# Altium PCB Main.PcbDoc (part 2 of 4)
Units mm, origin at the board's own origin, x right, y up, seen from the top; angles counter-clockwise.
Board outline 180 x 80 mm, 4 copper layers (L1_TOP, L2_GND, L3_PWR, L4_BOT), stack 1.447 mm thick; 236 components, 173 nets, 792 pads, 473 vias.
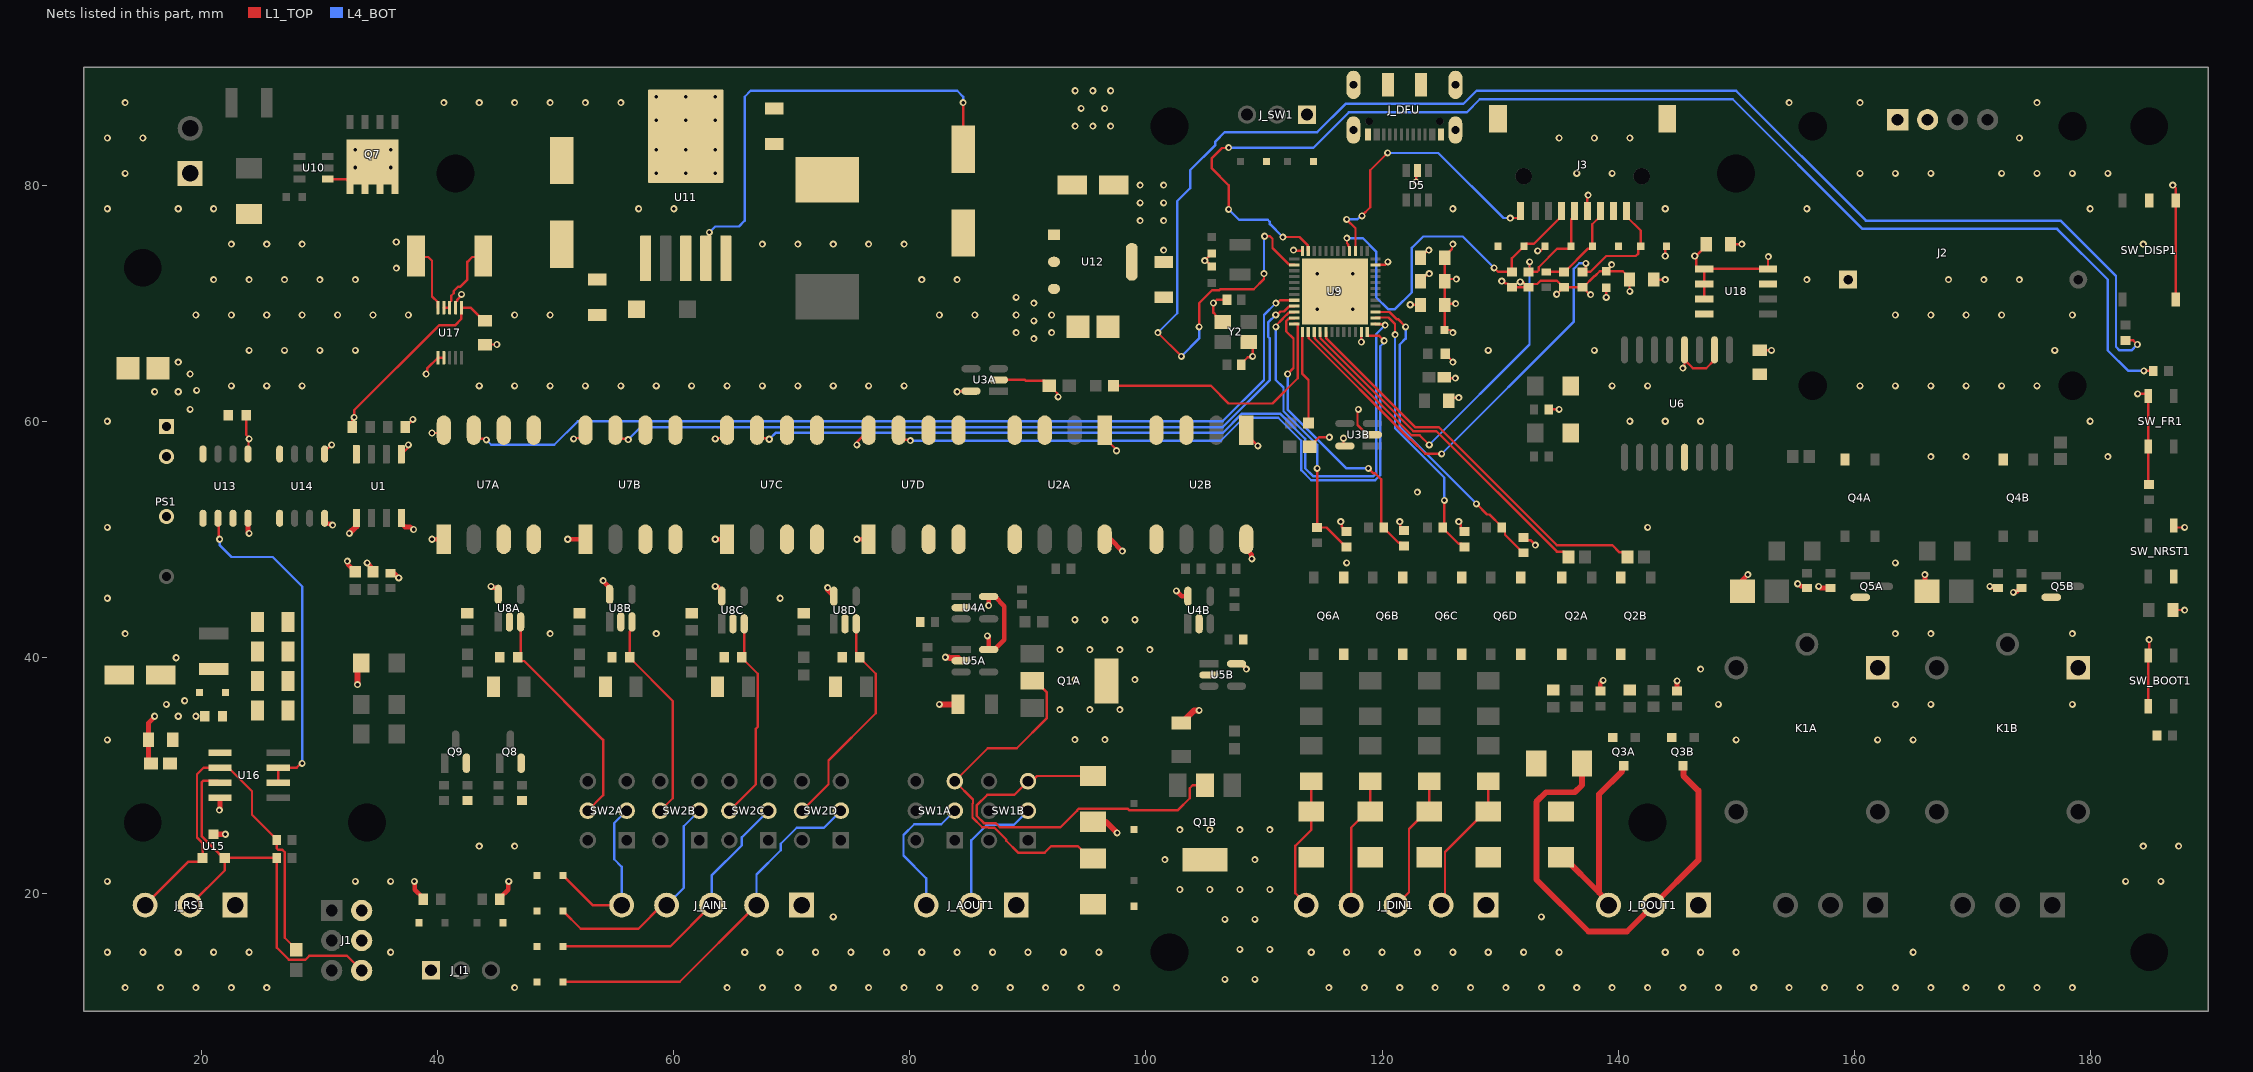
[diagram p4: the nets of this part, all layers, seen from the top]

## Part data (continued)
C19: library part CMP-2000-06208-3, "CAP ALUM 100UF 20% 50V SMD", Case/Package=Radial, Dielectric Material=Aluminium, ESR (Equivalent Series Resistance)=340mR, Leakage Current=3uA, Max Operating Temperature=105°C, Min Operating Temperature=-55°C, Package Quantity=1, Ripple Current=350mA, Tolerance=20%, Voltage=50V, Capacitance=100uF, Construction=Cylindrical, Contact Plating=Tin, Diameter=8mm, Height=10.2mm, Height - Seated (Max)=0.402inch, Impedance=340mR, Lead Free="Lead Free", Length=10.2mm, Life (Hours)=2000Hour, Material=Aluminium, Mount="Surface Mount", Number of Pins=2, Packaging="Tape and Reel", Radiation Hardening=No, REACH SVHC="No SVHC", Ripple Current (AC)=350mA, RoHS Compliant=Yes, Series=FK, Termination=SMD/SMT, Voltage Rating=50V, Voltage Rating (DC)=50V, Width=10mm
C20: library part CMP-2000-06215-2, "CAP ALUM 220UF 20% 35V SMD", Case/Package=Radial, ESR (Equivalent Series Resistance)=80mR, Leakage Current=77uA, Max Operating Temperature=105°C, Min Operating Temperature=-55°C, Package Quantity=500, Ripple Current=850mA, Tolerance=20%, Voltage=35V, Capacitance=220uF, Construction=Cylindrical, Contact Plating=Tin, Diameter=8mm, Height=10.2mm, Height - Seated (Max)=0.402inch, Lead Free="Lead Free", Lead Pitch=3.1mm, Length=10.5mm, Life (Hours)=2000Hour, Material=Aluminium, Mount="Surface Mount", Number of Pins=2, Packaging="Tape and Reel", Polarity=Polar, Radiation Hardening=No, REACH SVHC="No SVHC", Ripple Current (AC)=850mA, RoHS Compliant=Yes, Series=FP, Termination=SMD/SMT, Voltage Rating=35V, Voltage Rating (DC)=35V, Width=8.3mm
C21 C22 C24: library part CMP-2000-05018-2, "General Purpose Ceramic Capacitor, 1206, 100nF, 10%, X7R, 15%, 50V", Case Code (Imperial)=1206, Case Code (Metric)=3216, Dielectric=X7R, Dielectric Material=Ceramic, Insulation Resistance=100GR, Max Operating Temperature=125°C, Min Operating Temperature=-55°C, Package Quantity=1, Tolerance=10%, Voltage=50V, Capacitance=100nF, Case/Package=1206, Construction=Flat, Contact Plating=Tin, Depth=1.6mm, Dissipation Factor=2.5%, Height=0.94mm, Lead Free="Lead Free", Length=3.2mm, Mount="Surface Mount", Number of Pins=2, Packaging="Tape and Reel", Radiation Hardening=No, REACH SVHC="No SVHC", RoHS Compliant=Yes, Series=-, Termination=SMD/SMT, Thickness=0.037inch, Voltage Rating=50V, Voltage Rating (DC)=50V, Width=1.6mm
C27: library part CMP-2006-02792-2, "Chip Multilayer Ceramic Capacitors for General Purpose, 0603, 10uF, X5R, 15%, 20%, 6.3V", Case Code (Imperial)=0603, Case Code (Metric)=1608, Dielectric=X5R, Max Operating Temperature=85°C, Min Operating Temperature=-55°C, Package Quantity=4000, Tolerance=20%, Voltage=6.3V, Capacitance=10uF, Case/Package=0603, Depth=0.8mm, Height=0.8mm, Lead Free="Lead Free", Length=1.6mm, Material=Ceramic, Mount="Surface Mount", Packaging="Tape and Reel", Radiation Hardening=No, REACH SVHC="No SVHC", Termination=SMD/SMT, Thickness=0.035inch, Voltage Rating=6.3V, Voltage Rating (DC)=6.3V, Width=0.031inch
C30: library part CMP-2000-04979-3, "Multilayer Ceramic Capacitors 10μF ±10% 10V X5R SMD 0603", Case Code (Imperial)=0603, Case Code (Metric)=1608, Dielectric=X5R, Dielectric Material=Ceramic, Max Operating Temperature=85°C, Min Operating Temperature=-55°C, Package Quantity=1, Tolerance=10%, Voltage=10V, Capacitance=10uF, Case/Package=0603, Construction=Flat, Depth=0.8mm, Height=0.8mm, Lead Free="Lead Free", Length=1.6mm, Mount="Surface Mount", Number of Pins=2, Packaging="Tape and Reel", Radiation Hardening=No, REACH SVHC="No SVHC", Resistor Type=Ceramic, RoHS Compliant=Yes, Series=C, Termination=SMD/SMT, Thickness=0.035inch, Voltage Rating=10V, Voltage Rating (DC)=10V, Weight=7.1E-05oz, Width=0.8mm
D1A D1B D4A D4B D4C D4D D6 D7 D11 D13 D14 D15 D16 D23 D24: library part CMP-14432-000001-1, "TVS DIODE 5V 14V SOD323"
D2A D2B D3A D3B D10 D18A D18B D18C D18D: library part CMP-02577-000018-1, "TVS DIODE 30V 48.4V DO214AA", Breakdown Voltage=33.3V, Clamping Voltage=48.4V, Manufacturer="Vishay Semiconductor Diodes Division", Manufacturer Part Number=SMBJ30CAHE3/52, Max Junction Temp=+150°C, Package=DO-214AA, Peak Pulse Current=12.4A, Peak Pulse Power=600W, Reverse Standoff Voltage=30V, Temperature="-55°C to +150°C", Temperature Range Low=-55°C, Automotive=Yes, Automotive Grade="Grade 0", Category=Diode, ComponentLink2Description=Datasheet, ComponentLink2URL=http://www.vishay.com/docs/88392/smbj.pdf, Device Class L1="Circuit Protection", Device Class L2="TVS Diodes", Device Class L3=unset, Digikey Description="TVS DIODE 30V 48.4V DO214AA", Direction=Bidirectional, Footprint Url=http://www.vishay.com/docs/95401/smb.pdf, Height=2.44mm, Lead Free=Yes, Mouser Description="Diode TVS Single Bi-Dir 30V 600W 2-Pin DO-214AA T/R", Number Of Channels=1, Octopart=https://octopart.com/smbj30cahe3%2F52-vishay-43725255, RoHS=TRUE, Standoff Height=0mm, Temperature Range High=+150°C
D5: library part CMP-2000-05358-1, "RailClamp(R) Low Capacitance TVS Diode Array, 5 pF, 17.5 VC, -55 to 125 degC, 6-Pin SOT23, RoHS, Tape and Reel", Capacitance Value=5pF, Clamping Voltage=17.5V, Clamping Voltage (Max)=12.5V, Leakage Current=5uA, Manufacturer=Semtech, Operating Temp Range=-55Cto125C, Operating Temperature Classification=Military, Operating Temperature Max Deg. C=125C, Operating Temperature Min Deg. C=-55C, Package / Case=SOT-23, Package Description="6-Pin Small Outline Transistor, Body 2.9 x 1.6 mm, Pitch 0.95 mm", Package Reference=SOT23-6, Peak Pulse Current=12A, Peak Pulse Power Dissipation=300W, Reverse Breakdown Voltage=6V, Reverse Stand-off Voltage=5V, Test Current (It)=1mA, Configuration=Quad, Datasheet URL=https://datasheet.ciiva.com/8029/srv05-4-8029973.pdf, Datasheet Version=Jan-08, Direction Type=Uni-Directional, Leakage Current (Max)=5uA, Manufacturer URL=http://www.semtech.com/, Mounting=SurfaceMount, Mounting Style=SurfaceMount, Number of Elements=1, Packaging=TapeandReel, Pin Count=6, Polarity=Uni-Directional, Product Depth (mm)=1.6mm, Product Height (mm)=1.15mm, Product Length (mm)=2.9mm, Rad Hardened=No, Suppressor Type=DiodeArrays, Working Voltage=5V, Working Voltage (Max)=5V
D8 D9 D19 D22A D22B: library part CMP-1426-00017-3, "Led, Red, 630 Nm, 1.9 V, 30 Ma, 60 Mcd Rohs Compliant: Yes", Case Code (Imperial)=1206, Case Code (Metric)=3216, Color=Red, Forward Current=100mA, Forward Voltage=1.9V, Max Operating Temperature=85°C, Max Reverse Voltage (DC)=5V, Min Operating Temperature=-40°C, Test Current=20mA, Case/Package=1206, Dominant Wavelength=630nm, Height=680µm, Length=3.2mm, Lens Style="Clear, Rectangular", Luminous Intensity=60mcd, Mount="Surface Mount", Packaging="Tape and Reel", Peak Wavelength=645nm, REACH SVHC=Unknown, RoHS=Compliant, Viewing Angle=140°, Wavelength=630nm, Width=1.6mm
D12: "3A, 60V, Schottky Rectifier", Package="DO-221AC Taiwan Semiconductor", Availability="Not in stock", Check_prices=https://www.snapeda.com/parts/SS36ALH/Taiwan+Semiconductor/view-part/?ref=eda, MF="Taiwan Semiconductor", MP=SS36ALH, Price=None, SnapEDA_Link=https://www.snapeda.com/parts/SS36ALH/Taiwan+Semiconductor/view-part/?ref=snap
D17A D17B: library part CMP-12389-000001-1, "Rectifier, 1Kv, 1A, Do-214Ac Rohs Compliant: Yes"
D20 D21: library part CMP-1426-00015-3, "WL-SMCW SMT Mono-Color Chip LED Waterclear", Case Code (Imperial)=1206, Case Code (Metric)=3216, Color=Blue, Forward Current=100mA, Forward Voltage=3.2V, Manufacturer Package Identifier=LED_1206, Max Operating Temperature=85°C, Max Reverse Voltage (DC)=5V, Min Operating Temperature=-40°C, Test Current=20mA, Case/Package=1206, Dominant Wavelength=470nm, Height=680µm, Length=3.2mm, Lens Style="Clear, Rectangular", Luminous Intensity=145mcd, Mount="Surface Mount", Packaging="Tape and Reel", Peak Wavelength=465nm, REACH SVHC=Unknown, RoHS=Compliant, Viewing Angle=140°, Wavelength=470nm, Width=1.6mm
F1 F2: library part CMP-07400-000009-1, "PTC RESET FUSE 30V 200MA 1210", Current Rating=10A, Hold Current=0.2A, Manufacturer="Bourns Inc.", Manufacturer Part Number=MF-USMF020-2, Package=MF-USMF, Resistance=0.4-5Ω, Temperature="-40°C to +85°C", Temperature Range High=+85°C, Temperature Range Low=-40°C, Trip Current=0.4A, Voltage Rating=30V, Automotive=Yes, Automotive Grade="Grade 3", Category=Fuse, ComponentLink2Description=Datasheet, ComponentLink2URL=https://www.bourns.com/docs/Product-Datasheets/mfusmf.pdf, Device Class L1="Circuit Protection", Device Class L2="PTC Resettable Fuses", Device Class L3=unset, Digikey Description="PTC RESET FUSE 30V 200MA 1210", Height=1.1mm, Lead Free=Yes, Mouser Description="Resettable Fuses - PPTC 0.20A 30V 0.40ohm Hold .20A Trip .4A", Octopart=https://octopart.com/mf-usmf020-2-bourns-46429, RoHS=TRUE, Trip Time=0.02s
FB1: library part CMP-0686-00457-3, "Chip Ferrite Bead, 0603, 1000Ω @ 100MHz, 0.5Ω, 25%, 450mA", Case Code (Imperial)=0603, Case Code (Metric)=1608, Current Rating=400mA, DC Resistance (DCR)=500mR, DC Resistance-Max=700mR, Frequency=100MHz, Max Operating Temperature=125°C, Min Operating Temperature=-55°C, Package Quantity=1, Tolerance=25%, Case/Package=0603, Core Material=Ferrite, DC Current=400mA, Depth=0.8mm, Height=0.8mm, Impedance=1kR, Lead Free="Lead Free", Length=1.6mm, Material=Steel, Max Current Rating=400mA, Max DC Current=400mA, Military Standard=Not, Number of Circuits=1, Number of Lines=1, Number of Pins=2, Packaging="Tape and Reel", Radiation Hardening=No, REACH SVHC="No SVHC", Resistance=500mR, Series=BLM18A, Shielding=Unshielded, Termination=SMD/SMT, Test Frequency=100MHz, Width=0.8mm
J3: "Micro SD Card Connector, 8 Positions, Connector and Ejector, Push In, Auto Eject Out, Surface Mount, 1.85 mm Heaight Above Board, Gold Flash", Package=None, Check_prices=https://www.snapeda.com/parts/MSD-11-A/Same+Sky/view-part/?ref=eda, MF="Same Sky", MP=MSD-11-A, SnapEDA_Link=https://www.snapeda.com/parts/MSD-11-A/Same+Sky/view-part/?ref=snap
J-SUPPLY1: Manufacturer_Name=Degson, Manufacturer_Part_Number=15EDGRC-3.81-02P-14-00A(H), Datasheet Link=https://www.tme.com/uz/ru/details/15edgrc3.81-02p/klemmnye-kolodki-razemnogo-tipa/degson-electronics/15edgrc-3-81-02p-14-00a-h/, Geometry.Height=7.2mm
J_AIN1 J_DIN1: library part 15EDGRC-3.81-05P, Manufacturer_Name=Degson, Manufacturer_Part_Number=15EDGRC-3.81-02P-14-00A(H), Datasheet Link=https://www.tme.com/uz/ru/details/15edgrc3.81-02p/klemmnye-kolodki-razemnogo-tipa/degson-electronics/15edgrc-3-81-02p-14-00a-h/, Geometry.Height=7.2mm
J_AOUT1 J_DOUT1 J_RELAY1 J_RELAY2 J_RS1: library part 15EDGRC-3.81-03P, Manufacturer_Name=Degson, Manufacturer_Part_Number=15EDGRC-3.81-02P-14-00A(H), Datasheet Link=https://www.tme.com/uz/ru/details/15edgrc3.81-02p/klemmnye-kolodki-razemnogo-tipa/degson-electronics/15edgrc-3-81-02p-14-00a-h/, Geometry.Height=7.2mm
J_DFU: library part DX07S016JA1R1500, "USB-C (USB TYPE-C) USB 2.0 Receptacle Connector 24 (16+8 Dummy) Position Surface Mount, Right Angle; Through Hole", Package=None, Availability=Unavailable, MP=DX07S016JA1R1500, Price=None
J_I1 J_SW1: library part CMP-04776-000237-1, "CONN HEADER VERT 3POS 2.54MM", Color=Black, Contact Resistance=20mR, Current Rating=3A, Max Operating Temperature=125°C, Max Voltage Rating (DC)=350.35kV, Min Operating Temperature=-55°C, Voltage Rating=350V, Contact Gender=Male, Contact Material=Brass, Contact Mating Length=6.75mm, Contact Plating=Tin, Contact Post Length=2.9mm, Gender=Male, Glow Wire Compliant=Non-compliant, Housing Color=Black, Housing Material=Polyester, Lead Free="Lead Free", Mount="Through Hole", Number of Circuits=3, Number of Contacts=3, Number of Positions=3, Number of Rows=1, Orientation=Vertical, Packaging=Tray, Pitch=2.54mm, Radiation Hardening=No, REACH SVHC="No SVHC", RoHS Compliant=Yes, Series=90120, Termination=Solder, Voltage Rating (AC)=350V
K1A K1B: "5V Trigger Relay Module For Arduino And Raspberry Pi 5V Trigger Relay Module For Arduino And Raspberry Pi", Package="NON STANDARD-5 Songle Relay", Availability="Not in stock", Check_prices=https://www.snapeda.com/parts/SRD-05VDC-SL-C/Songle+Relay/view-part/?ref=eda, MF="Songle Relay", MP=SRD-05VDC-SL-C, Price=None, SnapEDA_Link=https://www.snapeda.com/parts/SRD-05VDC-SL-C/Songle+Relay/view-part/?ref=snap
L1: library part SPD127R-473M, "Fixed Inductors 47uH 20% .1ohm Shielded Choke SMT", Manufacturer_Name="API Delevan", Mouser Part Number=807-SPD127R-473M, Datasheet Link=https://componentsearchengine.com/Datasheets/1/SPD127R-473M.pdf, Geometry.Height=8mm, Manufacturer_Part_Number=SPD127R-473M, Mouser Price/Stock=https://www.mouser.co.uk/ProductDetail/API-Delevan/SPD127R-473M?qs=Ri2cEtl8%2FQnrzzldCovvkw%3D%3D
PS1: library part 2S7BE_0505S3U, "Isolated Module DC DC Converter 1 Output 5V 400mA 4.5V - 5.5V Input", Package=None, Check_prices=https://www.snapeda.com/parts/2S7BE_0505S3U/Gaptec/view-part/?ref=eda, MF=Gaptec, MP=2S7BE_0505S3U, SnapEDA_Link=https://www.snapeda.com/parts/2S7BE_0505S3U/Gaptec/view-part/?ref=snap
Q1A Q1B: library part CMP-1048-00522-1, "NPN Silicon Epitaxial Transistor, 4-Pin SOT-223, Pb-Free, Tape and Reel", Manufacturer="On Semiconductor", PartNumber=SBCP56T1G, ComponentLink1Description="Manufacturer URL", ComponentLink1URL=http://www.onsemi.com/, ComponentLink2Description=Datasheet, ComponentLink2URL=http://www.onsemi.com/pub_link/Collateral/BCP56T1-D.PDF, ComponentLink3Description="Package Specification", ComponentLink3URL=http://www.onsemi.com/pub_link/Collateral/318E-04.PDF, DatasheetVersion="Rev. 8", IC Continuous (A)=1, Mounting Technology="Surface Mount", PackageDescription="4-Pin Small Outline Transistor, Body 6.5 x 3.5 mm, Pitch 2.3 mm", PackageReference=SOT-223-4-318E-04, PackageVersion="Rev. N, 08/2009", Packing="Tape and Reel", Polarity=NPN, RoHS=TRUE
Q2A Q2B Q4A Q4B Q6A Q6B Q6C Q6D: library part CMP-22018-000003-1, "OPTOCPL 1 CH TRAN OUT SMT", Collector Emitter Voltage=80V, Emiiter Collector Voltage=6V, Forward Current=20mA, Forward Voltage=1.2V, Isolation Voltage=3750Vrms, Manufacturer=Lite-On, Max Current Transfer Ratio=600%, Max Junction Temp=+125°C, Min Current Transfer Ratio=300%, Power Dissipation=170mW, Temperature="-55°C to +110°C", Temperature Range High=+110°C, Temperature Range Low=-55°C, Automotive=No, Category=Trans, ComponentLink2Description=Datasheet, ComponentLink2URL=https://ve.mouser.com/datasheet/2/239/LTV-356T%20series%20201610-1139805.pdf, Device Class L1=Optoelectronics, Device Class L2=Optocouplers, Device Class L3=unset, Digikey Description="OPTOCPL 1 CH TRAN OUT SMT", Height=2.4mm, Lead Free=Yes, Manufacturer Part Number=LTV-356T-D, Octopart=https://octopart.com/ltv-356t-d-lite-on-11764243, Package=LTV-356T-D, Reverse Voltage=6V, RoHS=TRUE, Standoff Height=0mm
Q3A Q3B: library part CMP-83955-000006-1, "MOSFET N-CH 30V 5.7A SOT23", Case/Package=SOT-23, Continuous Drain Current (ID)=5.7A, Drain to Source Voltage (Vdss)=30V, Gate to Source Voltage (Vgs)=12V, Input Capacitance=630pF, Max Operating Temperature=150°C, Max Power Dissipation=1.4W, Min Operating Temperature=-55°C, Lead Free="Lead Free", Mount="Surface Mount", Number of Elements=1, Number of Pins=3, Packaging="Tape and Reel", Power Dissipation=1.4W, Radiation Hardening=No, Rds On Max=26.5mR
Q5A Q5B Q8 Q9: library part CMP-1693-00003-4, "TRANS NPN 40V 0.6A SMD SOT23-3", Case/Package=SOT-23, Collector Base Voltage (VCBO)=75V, Collector Emitter Breakdown Voltage=40V, Collector Emitter Saturation Voltage=1V, Continuous Collector Current=600mA, Current=1A, Emitter Base Voltage (VEBO)=6V, Frequency=300MHz, Max Operating Temperature=150°C, Max Power Dissipation=300mW, Min Operating Temperature=-55°C, Package Quantity=3000, Power Dissipation=350mW, Collector Emitter Voltage (VCEO)=40V, Contact Plating=Tin, Current Rating=600mA, Element Configuration=Single, Gain Bandwidth Product=300MHz, Height=1mm, hFE Min=100, Lead Free="Lead Free", Length=3.05mm, Max Breakdown Voltage=40V, Max Collector Current=600mA, Max Frequency=300MHz, Mount="Surface Mount", Number of Elements=1, Number of Pins=3, Packaging="Tape and Reel", Polarity=NPN, Radiation Hardening=No, REACH SVHC="No SVHC", Termination=SMD/SMT, Transition Frequency=300MHz, Voltage=40V, Voltage Rating (DC)=40V, Weight=0.000282oz, Width=1.4mm
Q7: "Type:1 N-channel Drain to Source Voltage: Current - Continuous Drain(Id): RDS(on):2.2mΩ@10V,20A Pd - Power Dissipation(Pd): Gate Threshold Voltage (Vgs(th)@Id):1.2V Gate Charge(Qg):65nC@10V Input Capacitance(Ciss@Vds):5341pF@15V Reverse Transfer Capacitan", Manufacturer=AGM-Semi(芯控源), Datasheet=https://atta.szlcsc.com/upload/public/pdf/source/20241030/BE071EF894F55F0B37AD6167FC56B3C6.pdf, Description_="Type:1 N-channel Drain to Source Voltage: Current - Continuous Drain(Id): RDS(on):2.2mΩ@10V,20A Pd - Power Dissipation(Pd): Gate Threshold Voltage (Vgs(th)@Id):1.2V Gate Charge(Qg):65nC@10V Input Capacitance(Ciss@Vds):5341pF@15V Reverse Transfer Capacitan", LCSC Part Name=AGM403A1-M1, Manufacturer Part=AGM403A1-M1, Reference=Q, Supplier=LCSC, Supplier Part=C42372665
R1 R2 R3 R4: library part CMP-2000-05024-1, "Chip Resistor, 4.7 KOhm, +/- 5%, 100 mW, -55 to 155 degC, 0603 (1608 Metric), RoHS, Tape and Reel", Case Code - in=0603, Case Code - mm=1608, Manufacturer=Yageo, Operating Temperature Range=-55Cto+155C, Package Description="2-Pin Surface Mount Device, Body 1.6 x 0.8 mm", Package Reference=603, Power Rating=100mW, Resistance=4.7kOhms, Temperature Coefficient=100PPM/C, Tolerance=5%, Voltage Rating=50V, Datasheet URL=http://www.yageo.com/documents/recent/PYu-RC_Group_51_RoHS_L_04.pdf, Datasheet Version="Rev. 4, 02/2016", Manufacturer URL=http://www.yageo.com/, Packaging=Reel, Product=ThickFilmResistorsGeneralPurpose, Series=RC, Termination Style=SMD/SMT
R5A R5B R14A R14B R14C R14D: library part CMP-2000-00523-2, "Chip Resistor, 47 KOhm, +/- 1%, 0.1 W, -55 to 155 degC, 0603 (1608 Metric), RoHS, Tape and Reel", Case Code (Imperial)=0603, Case Code (Metric)=1608, Colour=Red, Forward Current="20 mA", Forward Voltage="2.1 V", Max Operating Temperature="100 degC", Min Operating Temperature="-40 degC", Package Quantity=3000, Power Rating="90 mW", Case\Package=0603, ComponentLink1Description="Manufacturer URL", ComponentLink1URL=http://www.panasonic.com/, ComponentLink2Description=Datasheet, ComponentLink2URL=http://industrial.panasonic.com/cdbs/www-data/pdf/RDA0000/AOA0000C86.pdf, DatasheetVersion=Apr-15, Height="0.6 mm", Illumination Colour=Red, Length="1.6 mm", Lens Style=Clear, Luminous Intensity="63 mcd", Mount="Surface Mount", Nominal Vf="2.1 V", Nominal Wavelength="639 nm", PackageDescription="2-Pin Surface Mount Device, Body 1.6 x 0.85 mm", PackageReference=0603, Packaging="Tape and Reel", Pins=2, Radiation Hardening=No, REACH SVHC="No SVHC", RoHSCompliant=true, Viewing Angle="160 degrees", Width="0.8 mm"
R6A R6B: library part CMP-2000-00436-2, "Chip Resistors, 3.3 KOhm, +/- 1%, 0.1 W, 0603 (1608 Metric), -55 to 155 degC, RoHS, Tape and Reel", Case Code (Imperial)=0603, Case Code (Metric)=1608, Manufacturer=Panasonic, Max Operating Temperature=155degC, Max Power Dissipation=100mW, Min Operating Temperature=-55degC, Package Description="2-Pin Surface Mount Device, Body 1.6 x 0.85 mm", Package Quantity=1, Resistance=3.3KOhm, Temperature Coefficient=100ppm/degreesC, Tolerance=1%, Voltage Rating=75V, Case/Package=0603, Composition=ThickFilm, Contact Plating=Tin, Datasheet URL=https://industrial.panasonic.com/cdbs/www-data/pdf/RDA0000/AOA0000C283.pdf, Datasheet Version=42095.0, Depth=0.8mm, Height=0.022inch, Lead Free=LeadFree, Length=1.6mm, Manufacturer URL=http://www.panasonic.com/, Military Standard=Not, Mount=SurfaceMount, Number of Pins=2, Number of Terminations=2, Package Reference=0603, Package URL=http://www.st.com/st-web-ui/static/active/en/resource/technical/document/datasheet/CD00001320.pdf, Packaging=TapeandReel, Power Rating=100mW, Radiation Hardening=No, REACH SVHC=NoSVHC, RoHSCompliant=true, Termination=SMD/SMT, Voltage Rating (DC)=75V, Width=0.8mm
R7A R7B R46 R47: library part CMP-1012-00586-3, "Precision Thick Film Chip Resistor, 4.7 KOhm, +/- 1%, -55 to 155 degC, 0603 (1608 Metric), RoHS, Tape and Reel", Case Code (Imperial)=1206, Case Code (Metric)=3216, Case\Package=1205, Max Operating Temperature="125 degC", Min Operating Temperature="-55 degC", Package Quantity=1, Power Rating="250 mW", Resistance="220 Ohm", Tolerance=5%, Type (Resistor)="Thick Film", Voltage Rating="50 V", ComponentLink1Description="Manufacturer URL", ComponentLink1URL=http://www.panasonic.com/, ComponentLink2Description=Datasheet, ComponentLink2URL=http://industrial.panasonic.com/cdbs/www-data/pdf/RDA0000/AOA0000C86.pdf, DatasheetVersion=Apr-15, Elements=4, Height="0.024 inch", Length="0.126 inch", Mount="Surface Mount", PackageDescription="2-Pin Surface Mount Device, Body 1.6 x 0.85 mm", PackageReference=0603, Packaging="Tape and Reel", Pins=8, Radiation Hardening=No, REACH SVHC="No SVHC", RoHSCompliant=true, Width="0.063 inch"
R8A R8B R9A R9B R11A R11B R17 R19 R23 R24 R29 R30 R31 R32 R36A R36B R36C R36D R48 R49 R50 R51: library part CMP-1012-00623-3, "Chip Resistor, 10 KOhm, +/- 1%, 0.1 W, -55 to 155 degC, 0603 (1608 Metric), RoHS, Tape and Reel", Case Code (Imperial)=0603, Case Code (Metric)=1608, Manufacturer=Panasonic, Max Operating Temperature=155degC, Max Power Dissipation=100mW, Min Operating Temperature=-55degC, Package Description="2-Pin Surface Mount Device, Body 1.6 x 0.85 mm", Package Quantity=1, Package Reference=603, Resistance=10KOhm, Temperature Coefficient=100ppm\/degreesC, Tolerance=1%, Voltage Rating=75V, Case\/Package=0603, Composition=ThickFilm, Contact Plating=Tin, Datasheet URL=https://industrial.panasonic.com/cdbs/www-data/pdf/RDA0000/AOA0000C304.pdf, Datasheet Version=02/2017, Depth=0.8mm, Height=0.45mm, Lead Free=LeadFree, Length=1.6mm, Manufacturer URL=http://www.panasonic.com/, Military Standard=Not, Mount=SurfaceMount, Mounting Technology=SurfaceMount, Number of Pins=2, Number of Terminations=2, Packaging=TapeandReel, Power Rating=100mW, Radiation Hardening=No, REACH SVHC=NoSVHC, RoHSCompliant=true, Termination=SMD/SMT, Voltage Rating (DC)=75V, Width=0.031inch
R10A R10B: library part CMP-2003-00592-1, Manufacturer=Panasonic, Part Number=ERJ-8GEYJ241V
R12A R12B R35A R35B: library part CMP-2000-00914-1, Manufacturer=Panasonic, Part Number=ERA3AEB151V
R13A R13B: library part CMP-2000-03824-5, "Chip Resistor, 100 Ohm, +/- 1%, 100 mW,-55 to 155 degC, 0603 (1608 Metric), RoHS, Tape and Ree", Manufacturer="Vishay Semiconductor", ComponentLink1Description="Manufacturer URL", ComponentLink1URL=http://www.vishay.com/, ComponentLink2Description=Datasheet, ComponentLink2URL=http://www.vishay.com/docs/20035/dcrcwe3.pdf, DatasheetVersion=06/2012, Mounting Technology="Surface Mount", PackageDescription="2-Pin Surface Mount Device, Body 1.575 x 0.85 mm", PackageReference=0603
R15A R15B R15C R15D: library part CMP-2000-00317-1, Manufacturer=Panasonic, Part Number=ERJ-3EKF2001V
R16A R16B R16C R16D R42 R43 R44 R45: library part CMP-2003-04407-1, Manufacturer=Panasonic, Part Number=ERA8AEB103V
R18 R20 R41 R52A R52B: library part CMP-2000-00803-1, Manufacturer=Panasonic, Part Number=ERJ-3GEYJ512V
R21A R21B R22A R22B: library part CMP-1012-00109-2, Manufacturer=Panasonic, Part Number=ERJ-3GEYJ303V
R25: library part CMP-2000-00213-2, "Chip Resistor, 120 Ohm, +/- 1%, 0.1 W, -55 to 155 degC, 0603 (1608 Metric), RoHS, Tape and Reel", Case Code (Imperial)=0603, Case Code (Metric)=1608, Manufacturer=Panasonic, Max Operating Temperature=155degC, Max Power Dissipation=100mW, Min Operating Temperature=-55degC, Package Description="2-Pin Surface Mount Device, Body 1.6 x 0.85 mm", Package Quantity=1, Resistance=120Ohm, Temperature Coefficient=100ppm/degreesC, Tolerance=1%, Voltage Rating=75V, Case/Package=0603, Composition=ThickFilm, Contact Plating=Tin, Datasheet URL=https://industrial.panasonic.com/cdbs/www-data/pdf/RDA0000/AOA0000C283.pdf, Datasheet Version=42095.0, Depth=0.8mm, Height=0.022inch, Lead Free=LeadFree, Length=1.6mm, Manufacturer URL=http://www.panasonic.com/, Military Standard=Not, Mount=SurfaceMount, Number of Pins=2, Number of Terminations=2, Package Reference=0603, Package URL=http://www.st.com/st-web-ui/static/active/en/resource/technical/document/datasheet/CD00001320.pdf, Packaging=TapeandReel, Power Rating=100mW, Radiation Hardening=No, REACH SVHC=NoSVHC, RoHSCompliant=true, Termination=SMD/SMT, Voltage Rating (DC)=75V, Width=0.031inch
R26: library part CMP-26527-001289-1, "0.1Ω ±5% 1W 2512 Thick Film Chip Resistor AEC-Q200 compliant", Case Code (Imperial)=2512, Case Code (Metric)=6432, Max Operating Temperature=155°C, Max Power Dissipation=1W, Min Operating Temperature=-55°C, Resistance=100mR, Resistor Type="Thick Film", Temperature Coefficient=200ppm/°C, Tolerance=5%, Case/Package=2512, Construction=Rectangular, Contact Plating=Tin, Depth=3.2mm, Features="Automotive AEC-Q200", Height=0.028inch, Lead Free="Lead Free", Length=0.248inch, Military Standard=Not, Mount="Surface Mount", Number of Terminations=2, Packaging="Tape and Reel", Power Rating=1W, Radiation Hardening=No, RoHS Compliant=Yes, Series=RMCF, Size Code=2512, Width=0.126inch
R27 R28: library part CMP-2000-00435-2, "Chip Resistor, 330 Ohm, +/- 1%, 0.1 W, -55 to 155 degC, 0603 (1608 Metric), RoHS, Tape and Reel", Current Rating="500 mA", Max Operating Temperature="85 degC", Min Operating Temperature="-25 degC", Package Quantity=1500, Voltage Rating="10 V", ComponentLink1Description="Manufacturer URL", ComponentLink1URL=http://www.panasonic.com/, ComponentLink2Description=Datasheet, ComponentLink2URL=http://industrial.panasonic.com/cdbs/www-data/pdf/RDA0000/AOA0000C86.pdf, Contact Finish=Gold, Contact Material=Copper, Contact Plating=Gold, DatasheetVersion=Apr-15, Gender=Male, Height="1.45 mm", Lead Pitch="1.1 mm", Length="13.7 mm", Mating Cycles=10000, Mount="Surface Mount", PackageDescription="2-Pin Surface Mount Device, Body 1.6 x 0.85 mm", PackageReference=0603, Packaging="Tape and Reel", Pins=8, REACH SVHC="No SVHC", RoHSCompliant=true, Width="1.45 mm"
R33: library part CMP-2000-06939-1, "Chip Resistor, 33 Ohm, +/- 1%, 0.1 W, -55 to 155 degC, 0603 (1608 Metric), RoHS, Tape and Reel", Case Code - in=0603, Case Code - mm=1608, Manufacturer=Yageo, Operating Temperature Range=-55Cto+155C, Package / Case=0603(1608metric), Package Description="2-Pin Surface Mount Device, Body 1.6 x 0.8 mm", Power Rating=100mW, Resistance=33Ohms, Temperature Coefficient=100PPM/C, Tolerance=1%, Voltage Rating=75V, Brand=Yageo, Datasheet URL=http://www.yageo.com/documents/recent/PYu-RC_Group_51_RoHS_L_7.pdf, Datasheet Version="Rev. 7, 05/2017", Height=0.45mm, Length=1.6mm, Manufacturer URL=http://www.yageo.com/, Mounting Technology=SurfaceMount, Package Reference=0603, Packaging=Reel, Product=ThickFilmResistorsGeneralPurpose, Product Category=ThickFilmResistors, RoHS=True, Series=RC, Termination Style=SMD/SMT, Type=GeneralPurposeChipResistorSurfaceMount, Unit Weight=0.000071oz, Width=0.8mm
R34A R34B: library part CMP-2000-00336-1, Manufacturer=Panasonic, Part Number=ERJ3EKF2201V
R37A R37B R37C R37D R38A R38B R38C R38D: library part CMP-2003-04406-1, Manufacturer=Panasonic, Part Number=ERA8AEB102V
R39A R39B R39C R39D: library part CMP-2000-00335-2, "Chip Resistor, 220 Ohm, +/- 1%, 0.1 W, -55 to 155 degC, 0603 (1608 Metric), RoHS, Tape and Reel", Case Code (Imperial)=0603, Case Code (Metric)=1608, Max Operating Temperature="155 degC", Min Operating Temperature="-55 degC", Package Quantity=5000, Power Rating="100 mW", Resistance="22 Ohm", Tolerance=1%, Voltage Rating="50 V", Case\Package=0603, ComponentLink1Description="Manufacturer URL", ComponentLink1URL=http://www.panasonic.com/, ComponentLink2Description=Datasheet, ComponentLink2URL=http://industrial.panasonic.com/cdbs/www-data/pdf/RDA0000/AOA0000C86.pdf, DatasheetVersion=Apr-15, Height="0.45 mm", Length="1.6 mm", Mount="Surface Mount", PackageDescription="2-Pin Surface Mount Device, Body 1.6 x 0.85 mm", PackageReference=0603, Packaging="Tape and Reel", Pins=2, REACH SVHC="No SVHC", RoHSCompliant=true, Voltage Rating (DC)="50 V", Width="0.8 mm"
R40A R40B: library part CMP-2000-00182-1, Manufacturer=Panasonic, Part Number=ERJ-3EKF1003V
SW1A SW1B SW2A SW2B SW2C SW2D: library part CMP-10038-000022-1_1, "SWITCH SLIDE DPDT 300MA 6V", Actuator Color=Black, Contact Current Rating=100mA, Contact Resistance=70mR, Current Rating=300mA, Flammability Rating="UL94 V-0", Max Operating Temperature=85°C, Max Voltage Rating (DC)=6V, Min Operating Temperature=-40°C, Package Quantity=1, Actuator Length=2mm, Actuator Material=Nylon, Actuator Type=Standard, Contact Material="Copper Alloy", Contact Plating=Silver, Depth=3.6mm, Electrical Life=5000Cycles, Housing Material=Nylon, Illumination Type=Non-Illuminated, Lead Free="Lead Free", Length=9mm, Max Current Rating=300mA, Mount="Through Hole", Orientation=Vertical, Packaging=Bulk, Radiation Hardening=No, REACH SVHC="No SVHC", RoHS Compliant=Yes, Series=JS, Switch Function=On-On, Switch Travel=2mm, Termination="PC Pins", Throw Configuration=DPDT, Voltage Rating (DC)=6V
U1: library part CMP-04872-000011-1, "DGTL ISO 2.5KV 2CH I2C 8SOIC", Ambient Temperature Range High=+125°C, Ambient Temperature Range Low=-40°C, Manufacturer="Texas Instruments", Max Junction Temp=+136°C, Max Supply Voltage=5.5V, Min Supply Voltage=3V, Nominal Supply Current=1.7-3.1mA, Package=D0008A, Temperature="-40°C to +125°C", Automotive=No, Category=IC, ComponentLink2Description=Datasheet, ComponentLink2URL=http://www.ti.com/lit/ds/symlink/iso1540.pdf, Device Class L1="Integrated Circuits (ICs)", Device Class L2="Interface ICs", Device Class L3=unset, Digikey Description="DGTL ISO 2.5KV 2CH I2C 8SOIC", Height=1.75mm, Interface=I2C,SMBus,Other, Ipc Land Pattern Name=SOIC127P600X175-8, Lead Free=Yes, Manufacturer Part Number=ISO1540DR, Mouser Description="Digital Isolators Low-Power,Bidirec I2C Iso", Octopart=https://octopart.com/iso1540dr-texas+instruments-24334113, RoHS=TRUE, Standoff Height=0.11mm, Temperature Range High=+125°C, Temperature Range Low=-40°C
U2A U2B U7A U7B U7C U7D: "High Reliability Reinforced Isolated Amplifier", Manufacturer=Novosense, ComponentLink1Description=Datasheet, ComponentLink1URL=https://file.elecfans.com/web2/M00/63/D8/poYBAGMEo2GAVfdLABzacvfTaPY750.pdf, Manufacturer Part Number=NSI1200DDBR
U3A U3B U4A U4B U5A U5B U8A U8B U8C U8D: library part CMP-0187-00462-3, "IC OPAMP GP 1 CIRCUIT SOT23-5", Case/Package=SOT-23, Input Bias Current=1pA, Input Offset Voltage (Vos)=4.5mV, Max Operating Temperature=85°C, Max Supply Voltage=6V, Min Operating Temperature=-40°C, Min Supply Voltage=1.8V, Nominal Supply Current=100uA, Operating Supply Voltage=5.5V, Output Current=23mA, Package Quantity=1, Power Supply Rejection Ratio (PSRR)=86dB, Voltage Gain=112dB, Bandwidth=1MHz, Common Mode Rejection Ratio=60dB, Contact Plating=Tin, Gain Bandwidth Product=1MHz, Height=1.3mm, Lead Free="Lead Free", Length=3.1mm, Mount="Surface Mount", Number of Amplifiers=1, Number Of Channels=1, Number of Circuits=1, Number of Elements=1, Number of Pins=5, Operating Supply Current=100uA, Output Current per Channel=23mA, Packaging="Tape and Reel", Radiation Hardening=No, REACH SVHC="No SVHC", Slew Rate=0.6V/µs, Unity Gain Bandwidth Product=1MHz, Voltage=6V, Width=1.8mm
U6: library part CMP-0254-00002-2, "+/-5ppm, MEMS based Real-Time Clock, I2C Interface, 16-Pin SO, -40 to 85 degC, Pb-Free, Reel", Code_IPC=SOIC127P1030-16, Code_JEDEC=MS-013-AA, ComponentLink1Description="Manufacturer URL", ComponentLink1URL=http://www.maxim-ic.com, ComponentLink2Description=Datasheet, ComponentLink2URL=http://datasheets.maxim-ic.com/en/ds/DS3231M.pdf, ComponentLink3Description="Package Specification", ComponentLink3URL=http://pdfserv.maxim-ic.com/package_dwgs/21-0042.PDF, DatasheetVersion="Rev 3, Dec-2011", PackageDescription="16-Pin Small-Outline IC, Wide (0.3in), 1.27 mm Pitch, SOIC (W), Pb-Free", PackageReference=W16MK+1, PackageVersion="revD, 2010"
U9: "ARMÂ® CortexÂ®-M4F STM32G4 Microcontroller IC 32-Bit Single-Core 170MHz 128KB (128K x 8) FLASH 48-UFQFPN (7x7)", Package="UFQFPN-48 STMicroelectronics", Check_prices=https://www.snapeda.com/parts/STM32G431CBU6/STMicroelectronics/view-part/?ref=eda, MF=STMicroelectronics, MP=STM32G431CBU6, SnapEDA_Link=https://www.snapeda.com/parts/STM32G431CBU6/STMicroelectronics/view-part/?ref=snap
U11: library part CMP-2000-06545-1, "Simple Switcher(R) Power Converter 150 kHz Step-Down Voltage Regulator, 3 A, 4.5 to 40 V, -40 to 125 degC, 5-Pin TO-263 (KTT), Green (RoHS & no Sb/Br), Tape and Reel", Manufacturer="Texas Instruments", Operating Temperature Max=125°C, Operating Temperature Min=-40°C, Operating Temperature Range=-40°Cto+125°C, Output Current=3A, Output Voltage=37V, Package Description="5-Pin Plastic Flange Mount, Body 10.16 x 8.925 mm, Pitch 1.7 mm", Package Reference=KTT5, Package Version="4200577-4/G, 01/2013", PartNumber=LM2596, Primary Input Voltage=40V, Voltage Regulator Case Style=TO-263, Datasheet URL=http://www.ti.com/lit/ds/symlink/lm2596.pdf, Datasheet Version="Rev. C, 04/2013", Manufacturer URL=http://www.ti.com/, Mounting Technology=SurfaceMount, MSL=MSL3-168hours, No. of Outputs=1, No. of Pins=5, Number of Outputs=1, Package URL=http://www.ti.com/litv/pdf/mpsf007e, SVHC=NoSVHC(19-Dec-2012)
U12: library part CMP-209535-000001-1, "LDO Voltage Regulators 1A, 3.3V", Dropout Voltage=1.1V, Manufacturer="Advanced Monolithic Systems", Max Junction Temp=+125°C, Max Power Dissipation=1.2W, Max Supply Voltage=15V, Nominal Supply Current=5mA, Output Current=1A, Output Voltage=3.3V, Package=AMS1117, Temperature="-40°C to +125°C", Temperature Range Low=-40°C, Automotive=No, Category=IC, ComponentLink2Description=Datasheet, ComponentLink2URL=http://www.advanced-monolithic.com/pdf/ds1117.pdf, Device Class L1="Integrated Circuits (ICs)", Device Class L2="Power Management ICs", Device Class L3="Voltage Regulators - Linear", Height=1.8mm, Ipc Land Pattern Name=SOT229P700X180-4, Lead Free=Yes, Manufacturer Part Number=AMS1117-3.3, Number of Outputs=1, Octopart=https://octopart.com/ams1117-3.3-advanced+monolithic+systems-25899300, Output Type=Fixed, RoHS=TRUE, Standoff Height=0.64mm, Temperature Range High=+125°C
U13 U14: "Dual Channel Standard Digital Isolators"
U15: library part CMP-2000-07553-1, "TVS Array - Asymmetrical Data Line Protector, 600 W, 7.5 V, -55 to 150 degC, 3-Pin SOT23, RoHS, Tape and Reel", Capacitance=75pF, Case\/Package=SOT-23, Clamping Voltage=17V, Current=20uA, Manufacturer="Protek Devices", Max Operating Temperature=150degC, Min Breakdown Voltage=7.5V, Min Operating Temperature=-55degC, Package Description="3-Pin Small Outline Transistor, Body 2.92 x 1.3 mm, Pitch 0.94 mm", Package Reference=SOT23-3, Power Dissipation=600W, Voltage=12V, Working Voltage=7V, Datasheet URL=www.protekdevices.com/xyz/documents/datasheets/psm712.pdf, Datasheet Version=10/2013, Depth=1.4mm, Direction=Bidirectional, Element Configuration=Dual, Lead Free=LeadFree, Leakage Current=20uA, Length=3.04mm, Manufacturer URL=http://www.protekdevices.com/, Mounting Technology=SurfaceMount, Number of Pins=3, Packaging=TapeandReel, Radiation Hardening=No, RoHSCompliant=True
U16: "Low-Power, Slew-Rate-Limited RS-485/RS-422 Transceivers", Package="SOIC-8 Maxim", Check_prices=https://www.snapeda.com/parts/MAX485CSA+/Analog+Devices/view-part/?ref=eda, MF="Analog Devices", MP=MAX485CSA+, SnapEDA_Link=https://www.snapeda.com/parts/MAX485CSA+/Analog+Devices/view-part/?ref=snap
U17: library part CMP-0704-00058-2, "High-Side Measurement, Bi-Directional Current / Power Monitor with I2C Interface, 2.7 to 5.5 V, -40 to 125 degC, 10-pin SOP (DGS10), Green (RoHS & no Sb/Br)", PartNumber=INA226AIDGSR, Quiescent Current (+/-)(Typ)(mA)=0.33, Rating=Catalog, CMRR(Min)(dB)=126, Code_JEDEC=MO-153, Common Mode Range(Max)(V)=36, Common Mode Range(Min)(V)=0, ComponentLink1Description="Manufacturer URL", ComponentLink1URL=http://www.ti.com/, ComponentLink2Description=Datasheet, ComponentLink2URL=http://www.ti.com/general/docs/lit/getliterature.tsp?genericPartNumber=INA226&fileType=pdf, ComponentLink3Description="Package Specification", ComponentLink3URL=http://www.ti.com/lit/ml/mpds035b/mpds035b.pdf, DatasheetVersion=SBOS547, Eco-Plan="Green (RoHS & no Sb/Br)", Gain(V/V)=1, Input Offset (+/-)(Max)(uV)=10, Input Offset Drift (+/-)(Max)(uV/Degrees Celsius)=0.1, Mounting Technology="Surface Mount", PackageDescription="10-Pin Plastic Small Outline, Body 3 x 3 mm, Pitch 0.5 mm", PackageReference=DGS0010A, PackageVersion="4073272/C, 02/2004", Small-Signal Bandwidth(Typ)(MHz)=0.007, SubFamily="Current Shunt Monitor", Vs(Max)(V)=5.5, Vs(Min)(V)=2.7
U18: library part CMP-06313-000164-1, "IC EEPROM 32KBIT I2C 1MHZ 8SOIC", Case/Package=SOIC, Frequency=1MHz, Max Operating Temperature=85°C, Max Supply Voltage=5.5V, Min Operating Temperature=-40°C, Min Supply Voltage=1.7V, Nominal Supply Current=3mA, Operating Supply Voltage=5V, Package Quantity=100, Access Time=550ns, Access Time-Max=550ns, Density=32Kb, Height=1.5mm, Interface=Serial, Length=5.05mm, Max Frequency=1MHz, Memory Size=32Kb, Memory Type=EEPROM, Mount="Surface Mount", Number of Pins=8, Number of Words=4096, Organization=4KX8, Packaging=Bulk, Radiation Hardening=No, Reach SVHC Compliant=Yes, RoHS Compliant=Yes, Series=-, Supply Current=3mA, Width=3.99mm, Write Protection=YES
Y1: library part CMP-200220-000010-1, "CRYSTAL 32.7680KHZ 12.5PF SMD", Case/Package=SMD/SMT, ESR (Equivalent Series Resistance)=70kR, Frequency=32.768kHz, Frequency Tolerance=20ppm, Load Capacitance=12.5pF, Max Operating Temperature=125°C, Min Operating Temperature=-40°C, Package Quantity=1000, Height=0.035inch, Length=0.126inch, Mount="Surface Mount", Number of Pins=2, Packaging="Tape and Reel", Width=0.059inch
Y2: library part C3E-8.000-10-1020-M, Package=None, Availability=Unavailable, MP=C3E-8.000-10-1020-M, Price=None

## Free pads (board coordinates)
  rect 0x0 hole 3.2 unplated: MH0(15,26) MH0(15,73) MH0(34,26) MH0(41.5,81) MH0(102,15) MH0(102,85) MH0(142.5,26) MH0(150,81) MH0(185,15) MH0(185,85)

## Via types
v1: diameter 0.6, hole 0.3, L1_TOP to L4_BOT, 473 vias

## Nets (pads, with @x,y where several pads share a name; then routed paths per layer and width w, separated by ;. In a path a pad name is that pad's centre, name@x,y a point inside that pad or via, vN(x,y) a via of type N, cw(c..) or ccw(c..) an arc to the next point about the centre after c; other vN are vias at no path point)
3V3: C2.1 C3.2 C9.1 C10.1 C11.1 C23.2 C24.2 C28.2 C29.2 C30.2 C31.1 FB1.1 J2.2 J3.P4 R3.2 R4.2 R18.1 R19.1 R29.1 R30.1 R31.1 R32.1 R36A.1 R36B.1 R36C.1 R36D.1 SW_BOOT1.1 SW_BOOT1.2 SW_DISP1.1 SW_DISP1.2 SW_FR1.1 SW_FR1.2 U1.1 U2A.1 U2B.1 U3A.5 U3B.5 U6.2 U6.4 U7A.8 U7B.8 U7C.8 U7D.8 U9.23 U9.35 U9.48 U12.2 U12.4 U13.1 U14.1 U17.6 U18.1 U18.2 U18.3 U18.8 | length 114.5
  L1_TOP w0.2: C2.1@23.75,60.5 23.75,58.858 24,58.608 v1(24,58.5) 23.952,58.452 23.952,57.273 U13.1@23.905,57.225 ; U14.1@30.405,57.225 30.405,57.405 v1(31,58) ; R4.2@32.75,59.5 32.75,60.166 v1(32.907,60.323) 32.907,60.4 32.907,60.942 40.087,68.122 41.443,68.122 41.982,68.661 41.982,69.607 U17.6@42,69.625 42.775,69.625 43.875,68.525 C28.2@44,68.525 ; U1.1@36.905,57.2 37.5,57.795 v1(37.5,58) ; R3.2@37.25,59.5 37.877,60.127 v1(37.877,60.156) ; v1(39.5,59) 40.26,59 U7A.8@40.5,59.24 ; v1(51.5,58.5) 51.577,58.577 52.038,58.577 52.5,59.038 U7B.8@52.5,59.24 ; v1(63.5,58.5) 63.577,58.577 64.038,58.577 64.5,59.038 U7C.8@64.5,59.24 ; v1(75.5,58) 75.5,58.24 U7D.8@76.5,59.24 ; v1(84,62.5) 84.05,62.55 U3A.5@85.168,62.55 ; U2A.1@96.5,59.24 96.5,58.59 97.5,57.59 v1(97.5,57.5) ; U2B.1@108.5,59.24 108.5,58.896 v1(109.485,57.91) ; v1(112.5,74.5) 112.565,74.435 U9.48@113.25,74.435 ; v1(116.5,51.5) 116.577,51.423 116.577,51.073 116.675,50.975 116.675,50.925 116.95,50.65 R36A.1@117,50.65 ; v1(116.734,58.555) 116.734,58.019 U3B.5@116.851,57.903 ; U9.23@118.25,67.565 118.253,67.562 118.253,66.716 v1(118.256,66.713) ; U9.35@119.435,73.25 120.25,73.25 v1(120.5,73.5) ; v1(121.5,51.5) 121.548,51.452 121.548,51.002 121.823,50.727 R36B.1@121.873,50.727 ; v1(126,67.5) 125.77,67.73 FB1.1@125.298,67.73 125.318,67.75 C11.1@125.318,69.857 ; v1(126,75) 125.923,74.923 125.923,74.588 125.318,73.982 C9.1@125.318,73.857 C10.1@125.318,71.857 ; v1(126.23,69.959) 125.42,69.959 C11.1@125.318,69.857 ; v1(126.308,72.045) 125.506,72.045 C10.1@125.318,71.857 ; v1(126.5,51.5) 126.5,51.392 126.675,51.217 126.675,50.925 126.95,50.65 R36C.1@127,50.65 ; v1(130.146,71.865) 130.254,71.865 130.455,71.664 130.636,71.664 130.95,71.35 R30.1@132.42,71.35 ; v1(131.71,71.8) 131.787,71.723 131.997,71.723 132.37,71.35 R30.1@132.42,71.35 ; R36D.1@132,50.15 132.226,49.924 132.576,49.924 v1(133,49.5) ; R18.1@134.125,61 v1(135,61) ; v1(134.801,70.755) 135.395,71.35 R31.1@135.43,71.35 ; J3.P4@137.4,77.82 137.4,79.104 v1(137.456,79.161) ; v1(137.679,70.721) 137.629,70.721 R32.1@137,71.35 ; v1(139.457,73.274) 139.457,73.157 C30.2@139,72.7 ; v1(141,71) 140.975,71.025 C31.1@140.975,72 140.975,72.125 140.4,72.7 C30.2@139,72.7 ; v1(145.5,64.5) 145.635,64.635 U6.4@145.635,65.2 ; U6.4@145.635,66.05 U6.4@145.635,65.2 ; U18.3@147.3,70.365 U18.2@147.3,71.635 U18.1@147.3,72.905 ; C29.2@147.475,75 147.475,74.875 146.6,74 v1(146.5,74) 146.5,73.892 146.625,73.767 146.625,73.105 146.825,72.905 U18.1@147.3,72.905 ; U6.2@148.175,66.05 148.175,65.2 147.469,64.494 146.341,64.494 U6.4@145.635,65.2 ; C3.2@152,66.025 152.975,66.025 v1(153,66) ; v1(152.741,73.949) 152.7,73.908 U18.8@152.7,72.905 U18.1@147.3,72.905 ; v1(184.03,62.314) 184.761,62.314 SW_FR1.2@184.925,62.15 SW_FR1.1@184.925,57.85 184.925,54.725 R19.1@185,54.65 ; SW_BOOT1.1@184.925,35.85 SW_BOOT1.2@184.925,40.15 185,40.225 v1(185,41.5) ; v1(187,80) 187.25,79.75 SW_DISP1.1@187.25,78.7 SW_DISP1.2@187.25,70.3 ; C11.1@125.318,69.857 C10.1@125.318,71.857 ; R30.1@132.42,71.35 132.695,71.625 133.152,71.625 133.427,71.9 134.83,71.9 135.38,71.35 R31.1@135.43,71.35 ; R31.1@135.43,71.35 R32.1@137,71.35 ; R32.1@137,71.35 137.05,71.35 138,72.3 138.041,72.3 138.442,72.7 C30.2@139,72.7
  other v1: 101.5,74.5 99.5,77 101.5,77 99.5,78.5 101.5,78.5 99.5,80 101.5,80 94,85 95.5,85 97,85 94.5,86.5 96.5,86.5 94,88 95.5,88 97,88
5V: C17.1 C20.2 C22.2 C25.1 L1.2 PS1.1 U11.4 U12.3 | length 39.6
  L1_TOP w0.2: U11.4@62.7,73.8 63,74.1 v1(63,76) ; C20.2@84.5,83.05 v1(84.5,87)
  L4_BOT w0.2: v1(63,76) 63.5,76.5 65.5,76.5 66,77 66,87.5 66.5,88 84,88 84.5,87.5 v1(84.5,87)
  other v1: 19,61 16,62.5 18,62.5 19.554,62.61 19,64 18,65 90.5,67 89,67.5 92,67.5 90.5,68.5 89,69 92,69 90.5,70 89,70.5
5V_ISO: C1.1 C18.2 C26.2 C27.1 D11.1 D17A.1 D17B.1 F2.2 J1.2 K1A.A1 K1B.A1 R1.2 R2.2 R11A.1 R11B.1 R34A.1 R34B.1 R41.1 R42.1 R43.1 R44.1 R45.1 R46.1 R47.1 R52A.2 R52B.2 U1.8 U2A.8 U2B.8 U4A.5 U4B.5 U5A.5 U5B.5 U7A.1 U7B.1 U7C.1 U7D.1 U8A.5 U8B.5 U8C.5 U8D.5 U13.8 U14.8 U16.8 | length 47.9
  L1_TOP w0.4: C27.1@15.698,31 15.475,31.223 C26.2@15.475,33 15.475,34.421 16,34.946 v1(16,35) ; v1(21.49,27.04) 21.536,27.086 U16.8@21.536,28.095 ; U13.8@23.905,51.775 23.905,50.595 v1(24,50.5) ; U14.8@30.405,51.775 30.405,51.404 30.497,51.312 30.912,51.312 31.024,51.2 v1(31.078,51.2) ; v1(32.329,48.152) 32.367,48.114 32.367,47.883 R47.1@33,47.25 ; v1(34,48) 34.5,47.5 R46.1@34.5,47.25 ; R41.1@36,47.125 36.283,47.125 v1(36.684,46.724) ; U1.8@36.905,51.8 36.905,51.325 37.192,51.038 37.666,51.038 37.881,50.824 v1(37.935,50.824) ; v1(38,21) 38.038,20.962 38.038,20.312 38.75,19.6 R1.2@38.75,19.5 ; v1(39.5,50) U7A.1@40.5,50 ; v1(44.5,46) 44.554,46 44.67,45.884 45.009,45.884 45.109,45.784 U8A.5@45.109,45.332 ; R2.2@45.25,19.5 45.25,19.6 45.962,20.312 45.962,20.962 v1(46,21) ; v1(51,50) U7B.1@52.5,50 ; v1(54,46.5) 54,46.446 54.55,45.896 U8B.5@54.55,45.332 ; v1(63.5,46) 63.538,45.962 63.706,45.962 64.05,45.617 U8C.5@64.05,45.166 ; v1(63.5,50) U7C.1@64.5,50 ; v1(73.02,45.896) 73.02,45.697 U8D.5@73.55,45.166 ; v1(75.5,50) U7D.1@76.5,50 ; v1(86.554,41.812) 86.666,41.7 U5A.5@86.666,40.65 87.15,40.65 88,41.5 88,44.326 87.176,45.15 U4A.5@86.666,45.15 86.666,44.388 v1(86.663,44.385) ; U2A.8@96.5,50 97,50 v1(98,49) ; v1(102.573,45.618) 103.025,45.166 U4B.5@103.55,45.166 ; U5B.5@107.666,39.45 108.117,39.45 108.462,39.106 108.462,39.038 v1(108.5,39) ; U2B.8@108.5,50 108.5,49.134 108.942,48.692 108.942,48.379 v1(108.98,48.341) ; R11A.1@138.5,37.15 138.5,37.795 v1(138.739,38.035) ; R11B.1@145,37.15 v1(145,38) ; D17A.1@150.55,45.6 150.55,46.55 v1(151,47) ; v1(155.211,46.23) 155.265,46.23 155.47,46.025 155.85,46.025 R52A.2@156,45.875 ; v1(157,46) 157.125,45.875 R34A.1@158,45.875 ; v1(166,47) 166,45.782 D17B.1@166.182,45.6 ; v1(171.5,46) 171.538,45.962 172.095,45.962 R52B.2@172.182,45.875 ; v1(173.5,45.5) 173.538,45.538 173.77,45.538 174.107,45.875 R34B.1@174.182,45.875
  other v1: 18,35 19.5,35 17,36 18.53,36.314 17.82,39.96
5V_ISO_GND: C1.2 C4A.2 C4B.2 C4C.2 C4D.2 C18.1 C26.1 C27.2 D1A.2 D1B.2 D2A.1 D2B.1 D3A.2 D3B.2 D4A.1 D4B.1 D4C.1 D4D.1 D11.2 D18A.2 D18B.2 D18C.2 D18D.2 D19.1 D23.2 D24.2 J1.4 J_AIN1.1 J_AOUT1.1 J_DIN1.1 J_DOUT1.1 J_I1.1 J_RS1.1 PS1.5 Q2A.3 Q2B.3 Q3A.2 Q3B.2 Q5A.2 Q5B.2 Q6A.2 Q6B.2 Q6C.2 Q6D.2 Q8.2 Q9.2 R10A.1 R10B.1 R15A.1 R15B.1 R15C.1 R15D.1 R16A.2 R16B.2 R16C.2 R16D.2 R22A.2 R22B.2 R40A.2 R40B.2 R42.2 R43.2 R44.2 R45.2 R50.1 R51.1 U1.5 U2A.5 U2B.5 U4A.2 U4B.2 U5A.2 U5B.2 U7A.3 U7A.4 U7B.3 U7B.4 U7C.3 U7C.4 U7D.3 U7D.4 U8A.2 U8B.2 U8C.2 U8D.2 U13.5 U13.7 U14.5 U15.3 U16.5 | length 11.9
  L1_TOP w0.5: U15.3@21,25 v1(22,25) ; v1(32.5,50.5) 33.095,51.095 U1.5@33.095,51.8 ; v1(33.186,37.686) 33.186,39.186 D19.1@33.5,39.5 ; v1(82.5,36) R10A.1@84.075,36 ; v1(83,40) 83.29,40 83.349,39.941 84.093,39.941 U5A.2@84.334,39.7 ; D2B.1@95.5,26.063 96.606,26.063 v1(97.556,25.112) ; R10B.1@103,34.425 104.075,35.5 v1(104.5,35.5)
  other v1: 13.5,12 16.5,12 19.5,12 22.5,12 25.5,12 46.5,12 64.5,12 67.5,12 70.5,12 73.5,12 76.5,12 79.5,12 82.5,12 85.5,12 88.5,12 91.5,12 94.5,12 97.5,12 115.5,12 118.5,12 121.5,12 124.5,12 127.5,12 130.5,12 133.5,12 136.5,12 139.5,12 142.5,12 145.5,12 148.5,12 151.5,12 154.5,12 157.5,12 160.5,12 163.5,12 166.5,12 169.5,12 172.5,12 175.5,12 178.5,12 12,15 15,15 18,15 21,15 24,15 36,15 66,15 69,15 72,15 75,15 78,15 81,15 84,15 87,15 90,15 93,15 96,15 114,15 117,15 120,15 123,15 126,15 129,15 132,15 135,15 144,15 147,15 150,15 165,15 73.5,18 133.5,18 12,21 33,21 36,21 183,21 186,21 43.5,24 46.5,24 184.5,24 187.5,24 12,33 150,33 162,33 165,33 148.5,36 163.5,36 166.5,36 178.5,36 147,39 13.5,42 49.5,42 58.5,42 163.5,42 166.5,42 178.5,42 12,45 69,45 163.5,48 12,51
24V: C19.2 C21.2 R26.1 U11.1 U17.8 U17.9 | length 6.7
  L1_TOP w0.2: U17.9@40.5,69.625 U17.8@41,69.625 41,70.075 41.125,70.2 41.125,70.625 41.346,70.846 41.346,71.025 41.729,71.408 41.908,71.408 42.5,72 42.5,73.5 42.916,73.916 43.767,73.916 R26.1@43.851,74
24V_PREMEASURE: Q7.5 Q7.6 Q7.7 Q7.8 Q7.9 R26.2 U10.1 U17.10 | length 8
  L1_TOP w0.2: U10.1@30.667,80.517 32.215,80.517 32.559,80.173 Q7.5@32.559,79.863 ; R26.2@38.149,74 38.233,73.916 39.175,73.916 39.5,73.591 39.5,70.575 40,70.075 U17.10@40,69.625
  other v1: 36.477,72.977 36.47,75.186 33,81.5 36,81.5 33,83 36,83
A: J_RS1.3 R23.2 R25.1 U15.1 U16.6 | length 34.7
  L1_TOP w0.2: J_RS1.3@15.19,19 18.87,22.68 19.74,22.68 U15.1@20.06,23 20.06,24.251 19.583,24.729 19.583,30.083 20.135,30.635 U16.6@21.536,30.635 22.26,30.635 24.251,28.644 24.251,26.649 26.35,24.55 R23.2@26.35,24.5 26.35,23.792 26.467,23.675 26.829,23.675 27.025,23.479 27.025,16.225 28,15.25 R25.1@28,15.2
AIN1: U7A.7 U9.8 | length 78.5
  L1_TOP w0.2: U7A.7@43.04,59.24 43.04,58.963 43.502,58.501 44.023,58.501 v1(44.1,58.424) ; v1(111,70) 111.108,70 111.358,70.25 U9.8@112.565,70.25
  L4_BOT w0.2: v1(44.1,58.424) 44.524,58 49.863,58 51.863,60 106.492,60 109.996,63.504 109.996,68.996 v1(111,70)
AIN1_FIELD: D4A.2 J_AIN1.5 SW2A.2 | length 14.7
  L1_TOP w0.2: D4A.2@50.6,21.5 53.1,19 J_AIN1.5@55.57,19
  L4_BOT w0.2: J_AIN1.5@55.57,19 55.57,22.256 54.946,22.88 54.946,25.946 SW2A.2@56,27
AIN2: U7B.7 U9.9 | length 65.8
  L1_TOP w0.2: U7B.7@55.04,59.24 55.04,58.981 55.502,58.519 56.05,58.519 v1(56.126,58.443) ; v1(110.995,69.003) 111.104,69.003 111.397,69.297 111.693,69.297 112.111,69.715 112.53,69.715 U9.9@112.565,69.75
  L4_BOT w0.2: v1(56.126,58.443) 57.184,59.5 106.5,59.5 110.5,63.5 110.5,67 110.346,67.154 110.346,68.354 v1(110.995,69.003)
AIN2_FIELD: D4B.2 J_AIN1.4 SW2B.2 | length 19
  L1_TOP w0.2: D4B.2@50.6,18.5 52.1,17 57,17 J_AIN1.4@59,19
  L4_BOT w0.2: J_AIN1.4@59.38,19 60.832,20.452 60.832,25.682 SW2B.2@62.15,27
AIN3: U7C.7 U9.25 | length 71.3
  L1_TOP w0.2: U7C.7@67.04,59.24 67.04,59.013 67.502,58.551 68.003,58.551 v1(68.079,58.474) ; U9.25@119.435,68.25 119.47,68.215 120.194,68.215 v1(120.269,68.14)
  L4_BOT w0.2: v1(68.079,58.474) 68.614,59.008 106.508,59.008 108.145,60.645 111.355,60.645 113.5,58.5 113.5,56 114.154,55.346 119.271,55.346 119.5,55.575 119.5,67.371 v1(120.269,68.14)
AIN3_FIELD: D4C.2 J_AIN1.3 SW2C.2 | length 24
  L1_TOP w0.2: D4C.2@50.6,15.5 59.69,15.5 J_AIN1.3@63.19,19
  L4_BOT w0.2: J_AIN1.3@63.19,19 63.19,21.499 65.754,24.063 65.754,24.754 SW2C.2@68,27
AIN4: U7D.7 U9.24 | length 59.5
  L1_TOP w0.2: U7D.7@79.04,59.24 79.04,58.884 79.493,58.431 79.966,58.431 v1(80.042,58.354) ; U9.24@118.75,67.565 118.75,67.27 118.785,67.235 119.75,67.235 120.168,66.817 v1(120.18,66.817)
  L4_BOT w0.2: v1(80.042,58.354) 80.051,58.346 106.341,58.346 108.29,60.295 111.205,60.295 113.15,58.35 113.15,55.855 114.009,54.996 119.416,54.996 119.85,55.43 119.85,66.35 120.103,66.603 120.103,66.74 v1(120.18,66.817)
AIN4_FIELD: D4D.2 J_AIN1.2 SW2D.2 | length 31.4
  L1_TOP w0.2: D4D.2@50.6,12.5 60.5,12.5 J_AIN1.2@67,19
  L4_BOT w0.2: J_AIN1.2@67,19 67,21.599 69.054,23.653 69.054,24.195 70.413,25.554 72.704,25.554 SW2D.2@74.15,27
AIN_SENSEA: C4A.1 SW2A.5 U8A.3 | length 19.8